# Altium PCB PCB1.PcbDoc
Units mil, origin at the board's own origin, x right, y up, seen from the top; angles counter-clockwise.
Board outline 1968.5 x 1968.5 mil, 2 copper layers (Top Layer, Bottom Layer); 9 components, 13 nets, 59 pads, 0 vias.
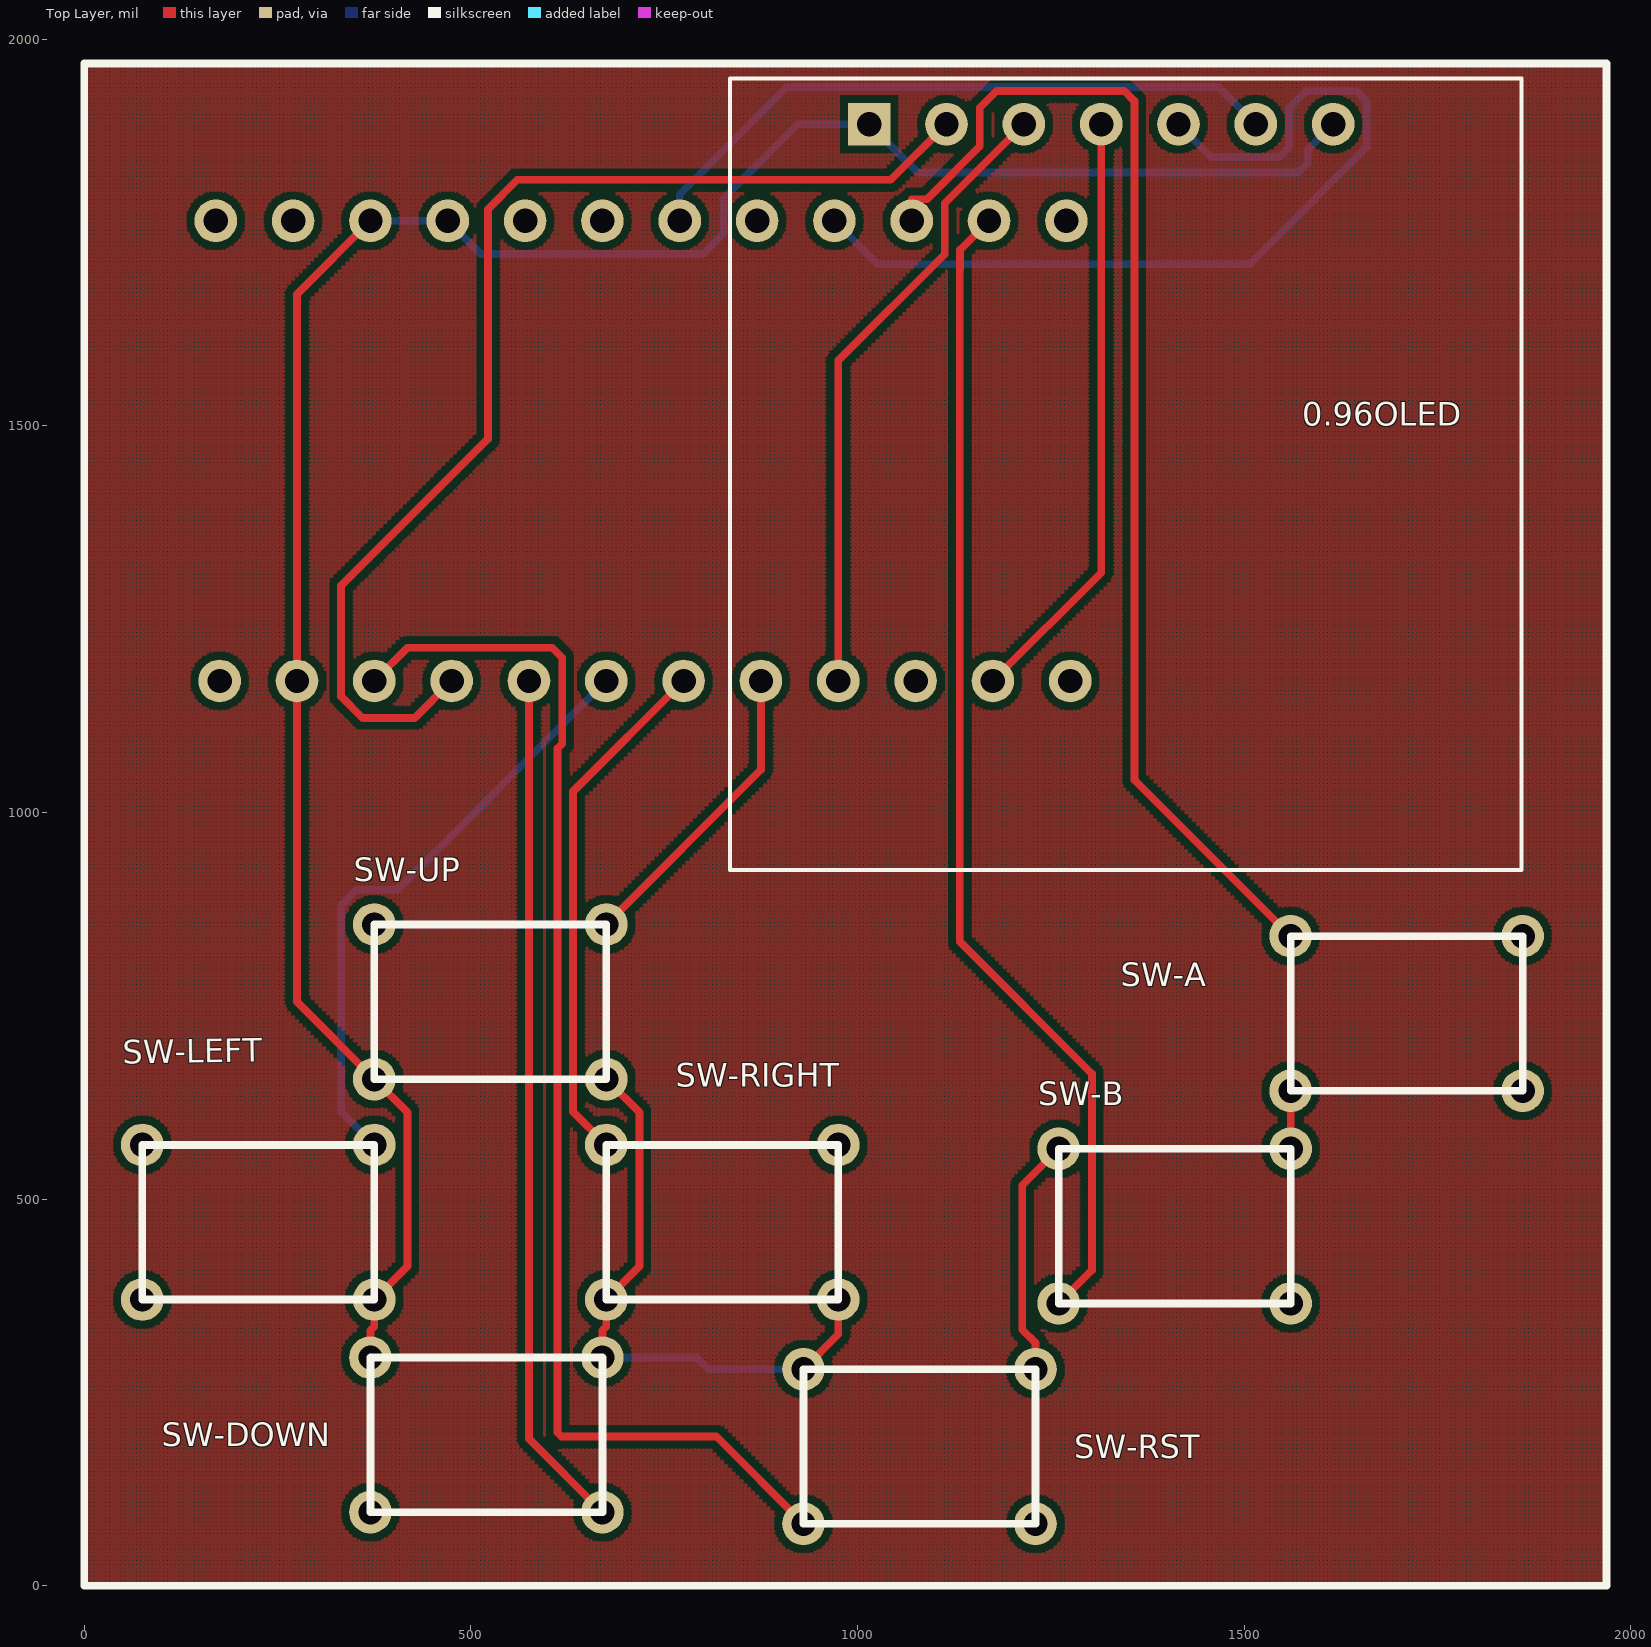
[diagram p0: Top Layer view]
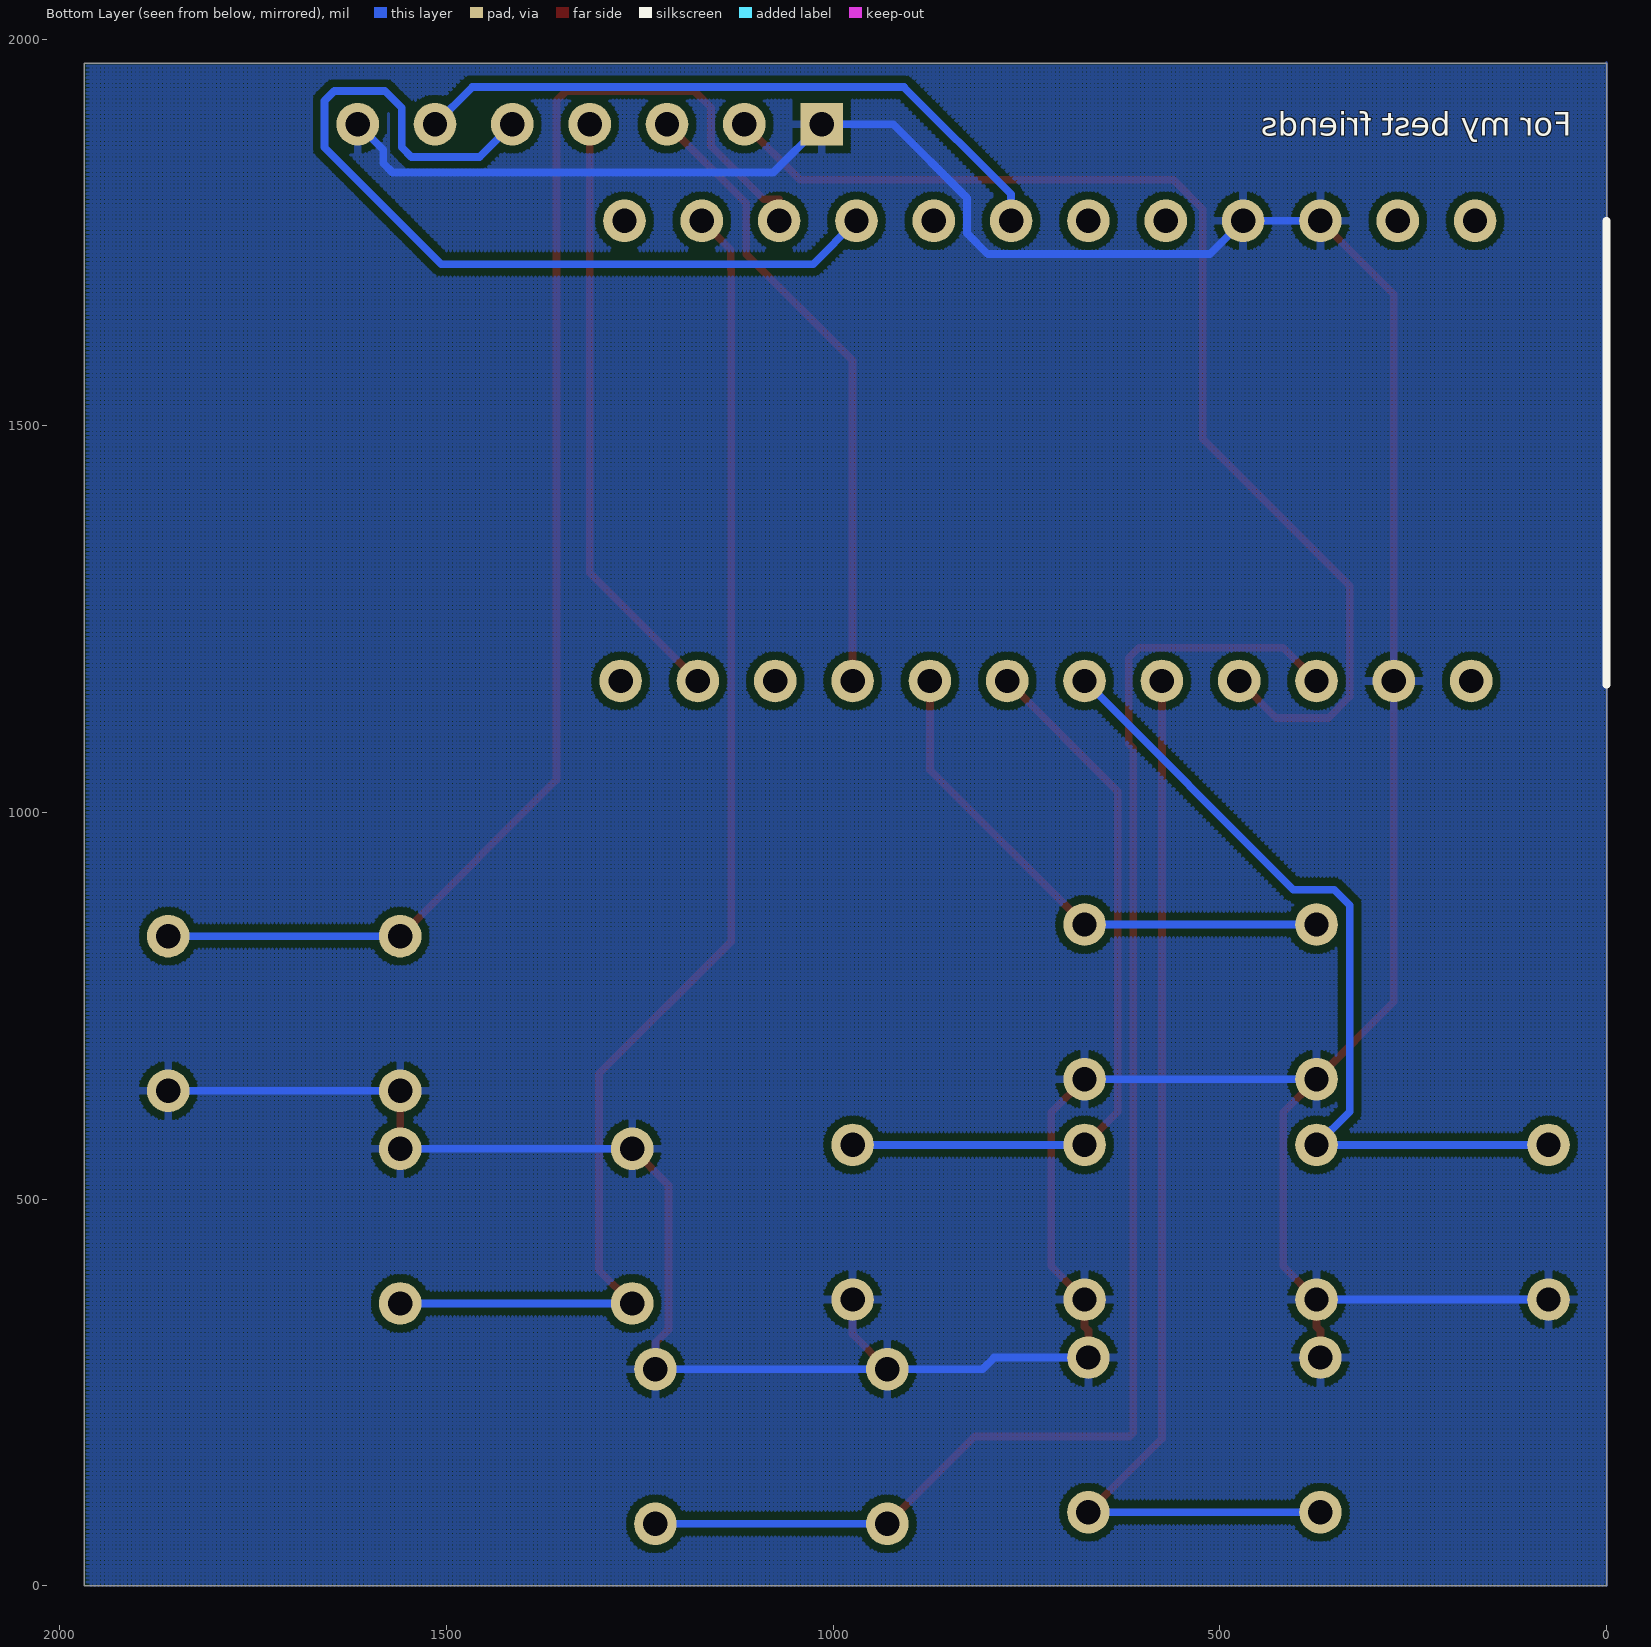
[diagram p1: Bottom Layer view, seen from below]

## Layer stack, top to bottom
Top Solder: solder mask 0.4, Solder Resist, Dk 3.5
Top Layer: signal copper 1.4
Dielectric 1: dielectric 12.6, FR-4, Dk 4.8
Bottom Layer: signal copper 1.4
Bottom Solder: solder mask 0.4, Solder Resist, Dk 3.5

## Board outline
0,0 1968.5,0 1968.5,1968.5 0,1968.5

## Design rules (kind name [scope] priority, off if disabled: settings)
Clearance Clearance_1 [InNetClass('power')] p1: gap=10 ignorepadtopadclearanceinfootprint=FALSE
Clearance [All] p2: gap=10 ignorepadtopadclearanceinfootprint=FALSE except(0: Arc-Hole Track-Hole SMDPad-Hole THPad-Hole Via-Hole Fill-Hole Poly-Hole Region-Hole Text-Hole)
PolygonConnect [All] p1: connectstyle=Relief reliefconductorwidth=10 reliefentries=4 polygonreliefangle="90 Angle" airgapwidth=10
RoutingVias [All] p1: holewidth=28 width=50 viastyle="Through Hole" minholewidth=28 minwidth=50 maxholewidth=28 maxwidth=50
SolderMaskExpansion [All] p1: expansion=4
Width [All] p1: maxlimit=10 minlimit=10 preferedwidth=10
30 further rules are at their usual default settings.

## Classes and differential pairs
net class power: GND VCC

## Components (designator, comment, footprint, x,y, rotation, side; value= is the part's Value field where it differs from the comment)
0.96OLED "SPI-OLED" SPI-OLED 835,930.43 r0 top
"For my best friends" "micro" micro 0,1865 r180 bottom (schematic designator "arduino micro pro")
SW-A "SW-PB_V" swich_buttom 1860,840 r180 top
SW-B "SW-PB_V" swich_buttom 1260,365 r0 top
SW-DOWN "SW-PB_V" swich_buttom 670,295 r180 top
SW-LEFT "SW-PB_V" swich_buttom 75,370 r0 top
SW-RIGHT "SW-PB_V" swich_buttom 675,370 r0 top
SW-RST "SW-PB_V" swich_buttom 1230,280 r180 top
SW-UP "SW-PB_V" swich_buttom 375,655 r0 top

## Footprints (in the part's own frame and the unit in brackets; to place one, negate y for a bottom-side part, rotate by r counter-clockwise, add the part's x,y. Pads: shape width x height; smd on the part's side, far side on the other; paste and mask are expansions set on the pad)
micro [mm]
  round 1.4 hole 0.8: 1(-4.318,-2.54) 2(-6.858,-2.54) 3(-9.398,-2.54) 4(-11.938,-2.54) 5(-14.478,-2.54) 6(-17.018,-2.54) 7(-19.558,-2.54) 8(-22.098,-2.54) 9(-24.638,-2.54) 10(-27.178,-2.54) 11(-29.718,-2.54) 12(-32.258,-2.54) 13(-4.445,-17.653) 14(-6.985,-17.653) 15(-9.525,-17.653) 16(-12.065,-17.653) 17(-14.605,-17.653) 18(-17.145,-17.653) 19(-19.685,-17.653) 20(-22.225,-17.653) 21(-24.765,-17.653) 22(-27.305,-17.653) 23(-29.845,-17.653) 24(-32.385,-17.653)
  silkscreen extent 0,-17.78 0,-2.54
SPI-OLED [mm]
  rect 1.4x1.4 hole 0.8: 1(4.572,24.373)
  round 1.4 hole 0.8: 2(7.112,24.373) 3(9.652,24.373) 4(12.192,24.373) 5(14.732,24.373) 6(17.272,24.373) 7(19.812,24.373)
  silkscreen extent 0,-0.13 26,25.87
swich_buttom [mm]
  round 1.4 hole 0.8: 1(0,0) 1(7.62,0) 2(0,5.08) 2(7.62,5.08)
  silkscreen extent 0,0 7.62,5.08

## Part data
SW-A SW-B SW-DOWN SW-LEFT SW-RIGHT SW-RST SW-UP: "SWITCH"

## Nets (pads, with @x,y where several pads share a name; then routed paths per layer and width w, separated by ;. In a path a pad name is that pad's centre, name@x,y a point inside that pad or via, vN(x,y) a via of type N, cw(c..) or ccw(c..) an arc to the next point about the centre after c; other vN are vias at no path point)
D0: 0.96OLED.3 "For my best friends.21" | length 819.4
  Top Layer w10: 975,1170 975,1584.44 1112.56,1722 1112.56,1787.56 0.96OLED.3
D1: 0.96OLED.4 "For my best friends.23" | length 778
  Top Layer w10: 1175,1170 1315,1310 0.96OLED.4
DC: 0.96OLED.6 "For my best friends.7" | length 856.7
  Bottom Layer w10: 770,1765 770,1799.41 908.59,1938 1467,1938 0.96OLED.6
GND: 0.96OLED.1 0.96OLED.7 "For my best friends.3" "For my best friends.4" "For my best friends.14" SW-A.2 SW-B.2 SW-DOWN.1 SW-LEFT.1 SW-RIGHT.1 SW-RST.1 SW-UP.1 | length 5668.7
  Top Layer w10: SW-DOWN.1@370,295 370,330 375,335 375,370 418,413 418,612 375,655 275,755 275,1170 275,1670 370,1765 ; SW-DOWN.1@670,295 670,330 675,335 675,370 718,413 718,612 SW-UP.1@675,655 ; SW-RST.1@930,280 975,325 SW-RIGHT.1@975,370 ; SW-RST.1@1230,280 1230,314 1213,331 1213,518 SW-B.2@1260,565 ; SW-B.2@1560,565 SW-A.2@1560,640
  Bottom Layer w10: SW-LEFT.1@75,370 SW-LEFT.1@375,370 ; 370,1765 470,1765 513,1722 800,1722 827,1749 827,1794.56 922.44,1890 0.96OLED.1 1077.56,1827.44 1570,1827.44 1582.01,1839.45 1582.01,1857.01 0.96OLED.7 ; SW-UP.1@375,655 SW-UP.1@675,655 ; SW-DOWN.1@670,295 792,295 807,280 930,280 SW-RST.1@1230,280 ; SW-B.2@1260,565 SW-B.2@1560,565 ; SW-A.2@1560,640 SW-A.2@1860,640
"Netarduino micro pro_10": "For my best friends.10" SW-A.1 | length 1872.2
  Top Layer w10: 1070,1765 1070,1793 1089.71,1793 1158,1861.29 1158,1911 1180,1933 1345,1933 1358,1920 1358,1042 SW-A.1@1560,840
  Bottom Layer w10: SW-A.1@1560,840 SW-A.1@1860,840
"Netarduino micro pro_11": "For my best friends.11" SW-B.1 | length 1804.4
  Top Layer w10: 1170,1765 1132.56,1727.56 1132.56,1702.44 1132,1701.88 1132,833 1303,662 1303,408 SW-B.1@1260,365
  Bottom Layer w10: SW-B.1@1260,365 SW-B.1@1560,365
"Netarduino micro pro_15": "For my best friends.15" SW-RST.2 | length 1937.6
  Top Layer w10: 375,1170 418,1213 605,1213 618,1200 618,1089 612,1083 612,198 617,193 817,193 SW-RST.2@930,80
  Bottom Layer w10: SW-RST.2@930,80 SW-RST.2@1230,80
"Netarduino micro pro_17": "For my best friends.17" SW-DOWN.2 | length 1414.4
  Top Layer w10: 575,1170 575,190 SW-DOWN.2@670,95
  Bottom Layer w10: SW-DOWN.2@370,95 SW-DOWN.2@670,95
"Netarduino micro pro_18": "For my best friends.18" SW-LEFT.2 | length 1090.9
  Bottom Layer w10: SW-LEFT.2@75,570 375,570 332,613 332,880 352,900 405,900 675,1170
"Netarduino micro pro_19": "For my best friends.19" SW-RIGHT.2 | length 977
  Top Layer w10: SW-RIGHT.2@675,570 632,613 632,1027 775,1170
  Bottom Layer w10: SW-RIGHT.2@675,570 SW-RIGHT.2@975,570
"Netarduino micro pro_20": "For my best friends.20" SW-UP.2 | length 697.8
  Top Layer w10: SW-UP.2@675,855 875,1055 875,1170
  Bottom Layer w10: SW-UP.2@375,855 SW-UP.2@675,855
OLEDRST: 0.96OLED.5 "For my best friends.9" | length 1165.1
  Bottom Layer w10: 970,1765 1026,1709 1507,1709 1658,1860 1658,1920 1645,1933 1580,1933 1558,1911 1558,1860 1545.44,1847.44 1457.56,1847.44 0.96OLED.5
VCC: 0.96OLED.2 "For my best friends.16" | length 1521.7
  Top Layer w10: 475,1170 427,1122 360,1122 332,1150 332,1293 522,1483 522,1780 560,1818 1043,1818 0.96OLED.2
pads on no net: "For my best friends.1" "For my best friends.2" "For my best friends.5" "For my best friends.6" "For my best friends.8" "For my best friends.12" "For my best friends.13" "For my best friends.22" "For my best friends.24"

## Polygon pours and split planes (outlines as drawn)
no net on Top Layer (hatched 90Degree grid 5 track 4, remove dead copper, pour order 0): 0,1965 1965,1965 1965,0 0,0
GND on Bottom Layer (hatched 90Degree grid 5 track 4, remove dead copper, pour order 2): 0,1970 5,1965 1965,1965 1965,0 0,0

## Silkscreen, mask and mechanical layers (free items; w line width, h text height)
Top Overlay:
  the board outline again, w10